# Allegro board ELRS-TX-MODULE-V13-20260610.brd
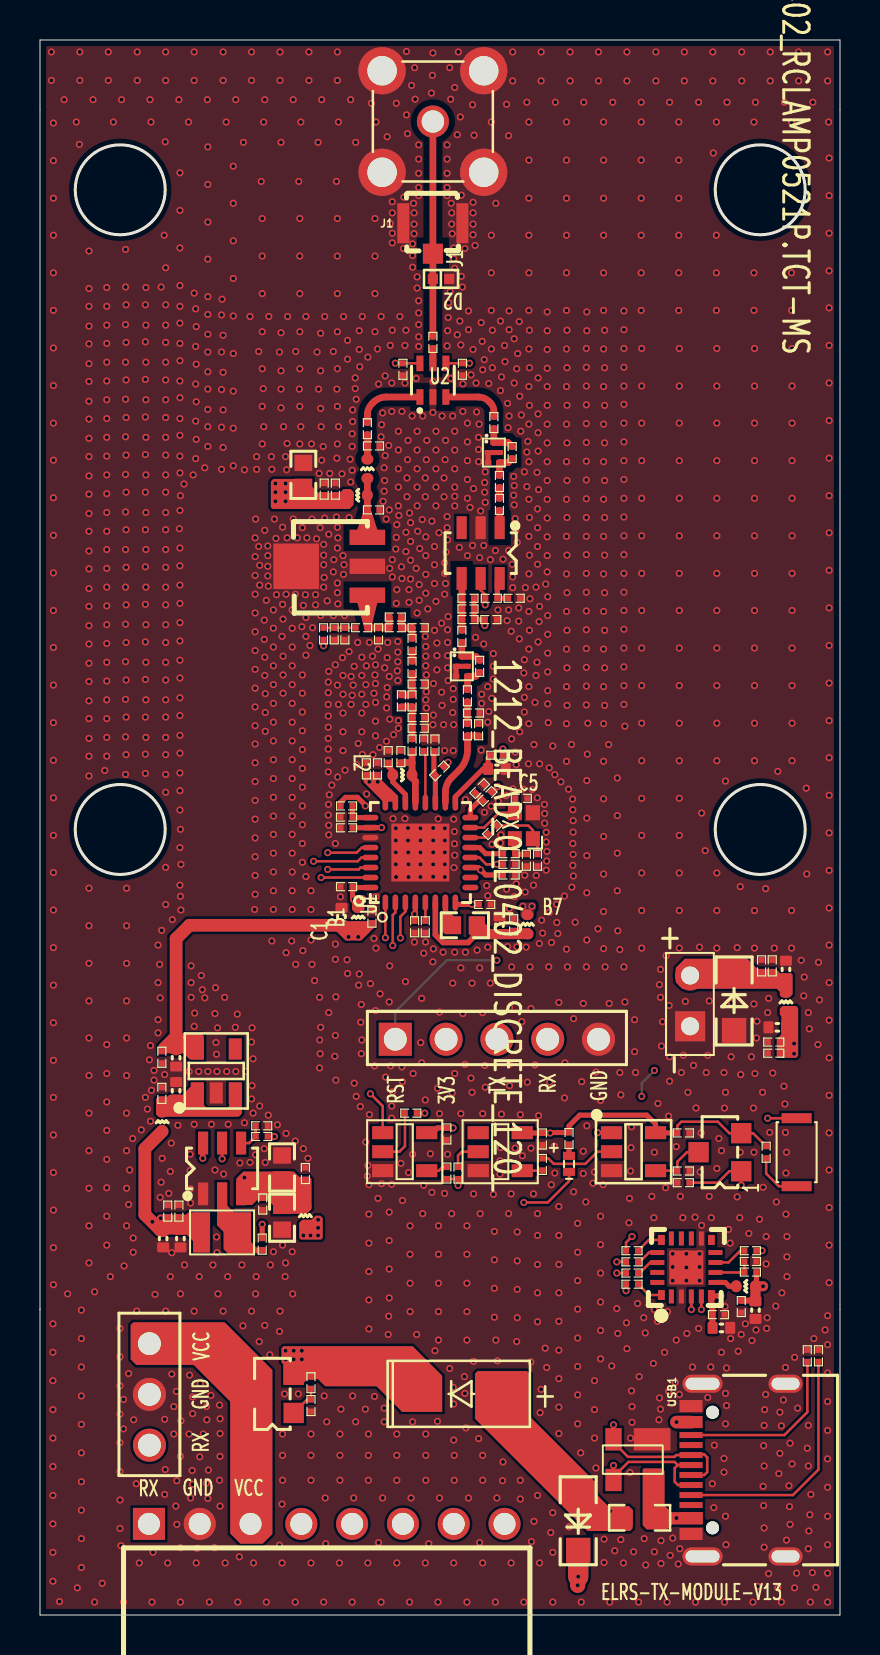
[diagram p0: board, top side]
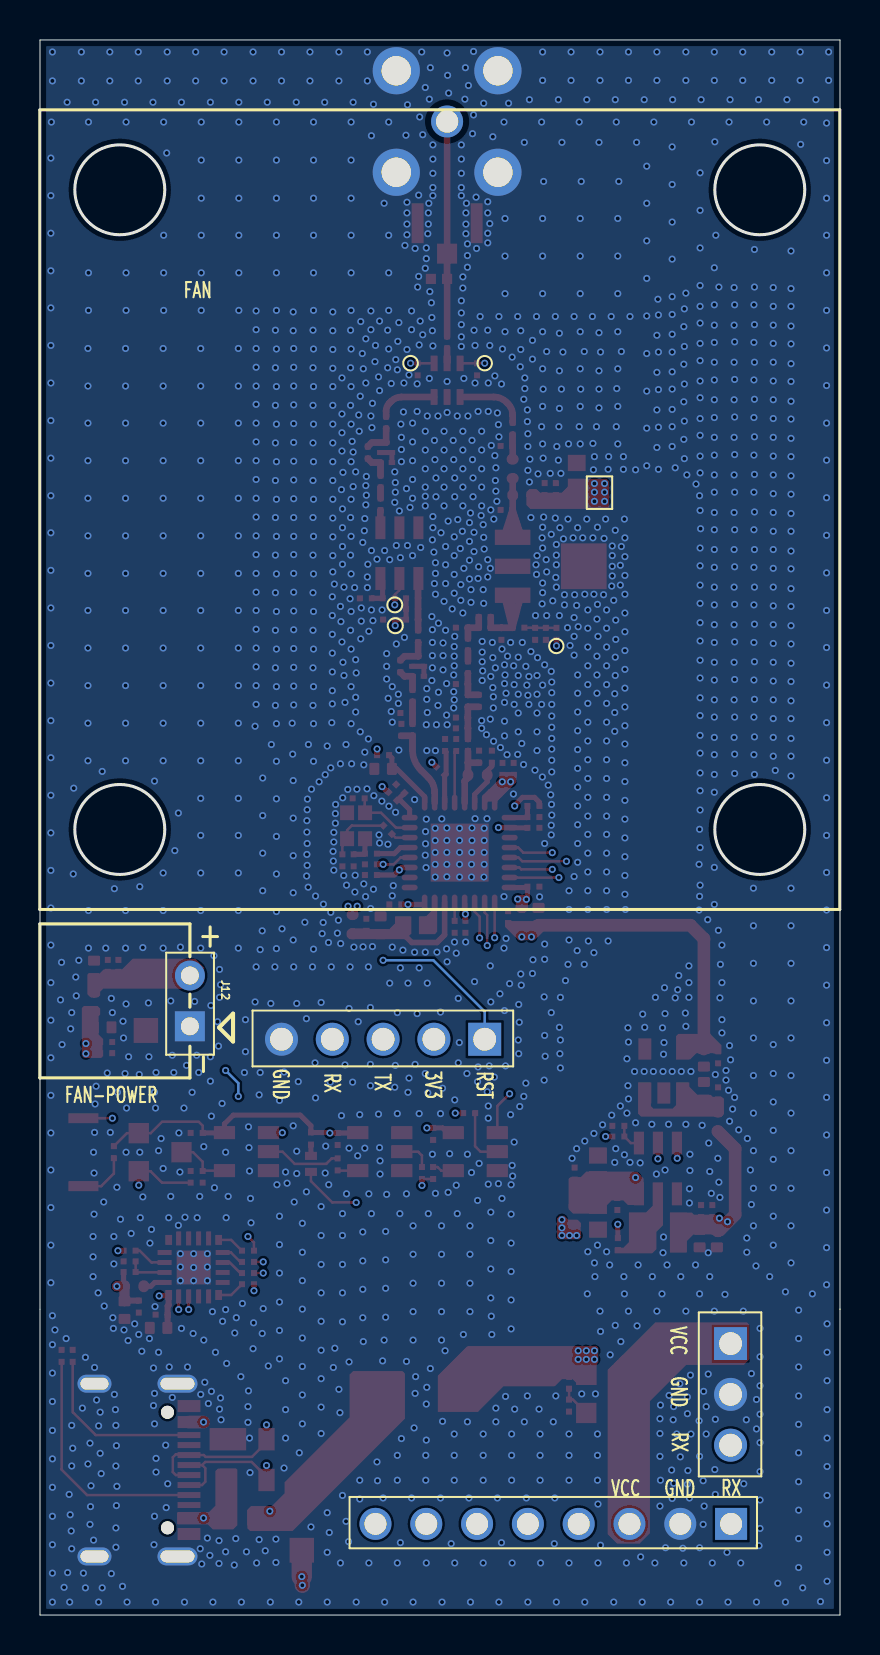
[diagram p1: board, bottom side, seen from below]

Outline 40 x 78.79 mm; copper layers: TOP, L2, L3, BOTTOM. Coordinates in mm from the lower left corner of the outline.
Outline path: circle c4.01,71.3 r2.25 ; circle c4.01,39.3 r2.25 ; circle c36.01,71.3 r2.25 ; circle c36.01,39.3 r2.25 ; 0,15.3 0,0 40,0 40,78.79 0,78.79 0,15.3 0,15.3

## Placement (name value [footprint] x y rotation side)
B1  120_100MHz  [L0402]  15.91 34.91 270 top
B4  1KR_100MHz/200mA  [0201]  22.36 40.96 225 top
B5  1KR_100MHz/200mA  [0201]  15.33 40.48 0 top
B6  1KR_100MHz/200mA  [0201]  19.98 42.23 225 top
B7  120_100MHz  [L0402]  24.37 34.56 270 top
B8  1KR_100MHz/200mA  [0201]  22.57 50.86 180 top
B9  120_100MHz  [L0402]  13.27 19.98 270 top
B10  120_100MHz  [L0402]  37.3 30.67 270 top
B11  120_100MHz  [L0402]  6.11 24.68 270 top
B12  120_100MHz  [L0402]  35.29 16.45 0 top
C1  22uF/6.3V  [C0402]  15.07 34.94 90 top
C2  1uF/10V  [0201]  16.6 34.91 90 top
C3  100nF 16V  [0201]  22.24 35.55 0 top
C5  22uF/6.3V  [C0402]  22.85 42.33 0 top
C6  100nF 16V  [0201]  16.88 42.33 90 top
C7  100nF 16V  [0201]  15.33 36.44 180 top
C10  100nF 16V  [0201]  21.98 41.34 45 top
C11  100nF 16V  [0201]  19.75 43.52 90 top
C12  100nF 16V  [0201]  15.33 39.92 180 top
C14  100nF 16V  [0201]  15.33 39.38 180 top
C18  NC  [0201]  24.88 37.76 270 top
C19  8pF  [0201]  24.06 40.86 0 top
C23  47pF  [0201]  19.65 63.67 90 top
C24  NC  [0201]  18.04 42.94 90 top
C25  NC  [0201]  18.91 44.36 0 top
C26  47pF  [0201]  18.15 62.32 270 top
C28  47pF  [0201]  21.12 62.32 270 top
C33  NC  [0201]  21.93 44.29 90 top
C34  NC  [0201]  21.68 45.12 0 top
C35  100nF 16V  [0201]  18.73 34.43 270 top
C36  100nF 16V  [0201]  17.41 42.94 90 top
C37  27pF  [0201]  17.77 49.39 0 top
C39  47pF  [0201]  15.24 49.09 270 top
C40  6.8pF  [0201]  18.91 44.9 0 top
C41  4.3pF  [0201]  18.91 46.57 0 top
C42  1.5pF  [0201]  18.07 45.73 90 top
C43  47pF  [0201]  16.37 59.35 90 top
C44  47pF  [0201]  22.97 56.71 90 top
C46  8pF  [0201]  16.67 58.48 180 top
C63  22uF/6.3V  [C0402]  6.16 18.83 270 top
C64  10uF 16V  [C0603]  12.1 19.88 270 top
C65  100nF 16V  [0201]  11.14 20.56 90 top
C66  100nF 16V  [0201]  11.11 18.56 270 top
C67  100nF 16V  [0201]  6.39 20.21 270 top
C76  100nF  [0201]  23.71 50.86 180 top
C78  2.2pF  [0201]  21.4 49.8 0 top
C79  1.5pF  [0201]  21.09 48.96 90 top
C80  100nF 16V  [0201]  22.54 49.8 0 top
C109  47pF  [0201]  14.77 56.33 90 top
C110  10nF  [0201]  14.21 56.33 90 top
C111  10uF 16V  [C0603]  13.17 57.04 90 top
C150  22uF/6.3V  [C0402]  7.02 18.83 90 top
C183  100nF 16V  [0201]  23.68 34.53 270 top
C185  10uF 6.3V  [C0402]  22.97 34.51 90 top
C189  100nF 16V  [0201]  25.12 23.81 90 top
C190  100nF 16V  [0201]  20.34 24.07 90 top
C191  100nF 16V  [0201]  24.32 37.76 90 top
C192  47pF  [0201]  18.6 48.55 90 top
C193  15pF  [0201]  16.67 55.28 180 top
C196  11pF  [0201]  16.93 49.09 90 top
C197  2pF  [0201]  18.91 49.39 0 top
C198  10uF 16V  [C0603]  12.1 22.39 90 top
C203  1uF/10V  [0201]  16.32 42.33 90 top
C204  1uF/10V  [0201]  23.46 37.02 0 top
C205  100nF 16V  [0201]  6.09 27.9 270 top
C206  10uF 6.3V  [C0402]  6.81 27.88 270 top
C207  100nF 16V  [0201]  6.09 26.1 90 top
C208  10uF 6.3V  [C0402]  6.81 26.23 90 top
C209  10uF 6.3V  [C0402]  36.87 29.4 180 top
C210  10nF  [0201]  36.69 28.66 180 top
C211  47pF  [0201]  36.69 28.11 180 top
C212  10uF 6.3V  [C0402]  37.3 32.3 90 top
C213  10nF  [0201]  36.61 32.47 90 top
C214  47pF  [0201]  36.08 32.47 90 top
C215  47pF  [0201]  13.27 22.09 90 top
C216  47pF  [0201]  6.95 20.21 90 top
C217  47pF  [0201]  22.69 59.65 90 top
C218  47pF  [0201]  21.37 45.99 90 top
C219  10uF 6.3V  [C0402]  35.77 15.25 270 top
C220  100nF 16V  [0201]  35.06 15.43 270 top
C221  10uF 6.3V  [C0402]  34.07 14.36 180 top
C222  100nF 16V  [0201]  33.92 15.02 180 top
C223  100nF 16V  [0201]  32.17 24.12 180 top
D1  B5819W  [SOD-123FL]  34.71 30.72 270 top
D2  RCLAMP0521P.TCT-MS  [TVS-0402]  20.05 66.84 0 top
D6  LED_RED  [LED0402]  26.45 22.57 90 top
D7  SS34  [SMA]  21.07 11.06 180 top
D8  B5819W  [SOD-123FL]  26.91 4.72 90 top
J1  -  [IPEX-1]  19.64 68.86 90 top
J5  CON3_W  [HD-2R54-1X3]  5.47 13.58 270 top
J6  CON5_NC  [HD-2R54-1X5-RN]  17.77 28.8 0 top
J10  SMA  [SMA-KE]  19.65 74.72 0 top
J12  CON2  [XHB-2R54X2]  32.51 30.72 90 bottom
J13  CON8  [HDR-TH_8P-2M54]  14.34 4.56 0 top
L2  220nH LQW15CNR22J10D  [L0402]  18.12 42.02 180 top
L3  4.7nH  [0201]  18.6 43.52 90 top
L6  12nH  [0201]  21.37 44.29 90 top
L8  7.5nH  [0201]  18.6 45.73 90 top
L9  8.2nH  [0201]  18.6 47.41 90 top
L10  1.5nH  [L0402]  16.37 57.34 270 top
L11  2.2uH 3A  [L2520]  9.1 19.14 270 top
L17  7.5nH  [0201]  22.97 55.56 90 top
L18  6.2nH  [0201]  21.4 50.33 0 top
L22  2.2UH 0.75A  [C0603]  21.25 34.51 0 top
L24  5.6nH  [L0402]  15.89 56.02 0 top
L32  120R/100M  [L0603]  29.98 4.86 180 top
NOREF  -  []  6.77 7.2 90 top
NOREF#2  -  []  21.08 51.85 0 top
NOREF#3  -  []  17.77 28.8 0 top
NOREF#4  -  []  5.47 11.04 90 top
NOREF#5  -  []  9.1 23.61 0 top
NOREF#6  -  []  25.39 28.8 0 top
NOREF#7  -  []  4.17 14.88 0 top
Q1  AO3401A  [SOT23]  11.62 11.06 90 top
Q5  AO3401A  [SOT23]  34 23.15 90 top
Q8  HTU7G06S002P  [SOT-89]  16.37 51.02 90 top
R2  5.1K  [0201]  38.36 12.97 90 top
R4  100K  [0201]  19.26 34.43 270 top
R11  100K/1%  [0201]  23.45 37.55 0 top
R13  49.9K  [0201]  14.18 49.09 90 top
R14  1K  [0201]  26.45 23.84 90 top
R15  49.9K  [0201]  14.71 49.09 270 top
R20  1KR_100MHz  [0201]  22.85 43.02 180 top
R21  49.9k/1%  [0201]  19.19 43.52 90 top
R23  100K  [0201]  32.17 21.63 180 top
R27  56K  [0201]  11.09 23.94 0 top
R28  10K  [0201]  11.09 24.47 180 top
R37  750R  [0201]  21.4 50.86 180 top
R71  22R  [0201]  18.54 25.11 0 top
R73  22R  [0201]  20.34 22.11 90 top
R74  22R  [0201]  25.12 22.54 90 top
R76  22R  [0201]  20.9 22.11 90 top
R81  NC  [0201]  22.62 39.28 45 top
R83  0R  [0201]  23.46 38.09 0 top
R84  1K  [0201]  36.31 23.15 90 top
R85  51R  [0201]  16.08 49.39 0 top
R86  10R  [0201]  17.77 49.92 180 top
R87  100K  [0201]  13.55 10.48 270 top
R88  100K  [0201]  13.55 11.62 270 top
R89  0R  [0201]  21.98 47.46 90 top
R90  0R  [0201]  23.61 58.15 90 top
R149  5.1K  [0201]  38.92 12.97 90 top
R150  1K  [0201]  35.52 18.23 180 top
R151  22.1K  [0201]  35.52 17.16 180 top
R152  47.5K  [0201]  35.52 17.69 180 top
R153  0R  [0201]  29.6 18.23 180 top
R154  0R_NC  [0201]  29.6 16.55 180 top
R155  22R  [0201]  29.6 17.11 0 top
R156  22R  [0201]  29.6 17.67 0 top
R157  100K  [0201]  32.17 22.21 0 top
SW7  SW-3x6x2_5  [SW-3X2X0_6]  37.83 23.15 270 top
U1  TK8620  [QFN32_8620]  19.02 38.14 90 top
U2  SW1179E  [SC70-6]  19.65 61.77 0 top
U4  SP0503BAHT  [SOT143]  29.64 7.77 90 top
U7  TPS563201DDCR  [SOT23-6]  9.1 22.34 90 top
U9  MS2630  [SOT23-6]  22.03 53.12 270 top
U10  ME6211C33M5G-N  [SOT23-5]  8.81 27.22 0 top
U13  CJ74LVC1G240R5N  [SOT23-5]  18.24 23.18 270 top
U14  SN74LVC1G04DCKR  [SOT23-5]  23.01 23.18 270 top
U15  SN74LVC1G66DBVR  [SOT23-5]  29.68 23.18 270 top
U16  SF11S5-915.000-F26IL02AL  [SMD1411-5P]  22.69 58.16 270 top
U17  SF11S5-915.000-F26IL02AL  [SMD1411-5P]  21.09 47.46 270 top
U18  CP2102N-A02-GQFN20R  [QFN-20-3X3]  32.32 17.39 0 top
USB1  TypeC_16P  [TYPEC_16P-SMD]  35.85 7.25 90 top
X1  X1E0002510059  [SMD2016-4P]  24.2 39.48 90 top

## Library data of the parts
B1 B4-B7 B9-B12 = 1212_BEAD_0
B8 L2 L3 L6 L8-L11 L17 L18 L22 L24 = INDUCTOR
C1 C2 C203 = CERAMIC CAPACITOR
C3 C5-C7 C10-C12 C14 C26 C28 C35 C36 C204 C210 C211 C213-C216 = Ceramic Capacitor_14
C18 C19 C23-C25 C33 C34 C40-C44 C76 C78-C80 C191 C192 C217 C218 = Ceramic Capacitor
C37 C39 C197 = C
C46 C63-C67 C150 C183 C185 C189 C190 C193 C196 C198 C223 = CAP_NP
C109-C111 C205-C209 C212 C219-C222 = CAPACITOR NON-POL
D1 D8 = DIODE PIN
D2 = TVS
D6 = MFOE1101_0
D7 = DIODE_1
J1 = IPEX-1
J5 = CON3
J6 = CON5
J10 = SMA_0
J12 = CON2
J13 = CON8
L32 = Ferrite bead
Q1 Q5 = PMOS_GSD
Q8 = MOSFET_EP_GDSD_0
R2 R23 R149-R152 = R
R4 R11 R20 R21 R37 R81 R83 R87-R90 R153 R154 R157 = Resister
R13 R15 R27 R28 R71 R73 R74 R76 R85 R86 R155 R156 = RES
R14 R84 = R_0
SW7 = SW PUSHBUTTON-SPST
U1 = K2201A_3
U2 = AS179-92
U4 = TPD4E002_4
U7 = BUCK_TPS563201
U9 = MS2630
U10 = BL8568CB5ATR33
U13 = BUCK_REF_SY8089_0
U14 = BUCK_REF_SY8089_1
U15 = SN74LVC1G66DBVR
U16 U17 = SF11S5-915.000-F26IL02AL
U18 = CP2102N-A02-GQFN20R
USB1 = TypeC_16P
X1 = Crystal_32M

## Footprints (pads in the part's own frame, mm; a bottom-side part is the same pattern mirrored in y, then rotated)
0201
  rect 0.3x0.3 smd: 1(-0.3,0) 2(0.3,0)
C0402
  custom 0.5x0.6 smd: 1(-0.44,0) 2(0.44,0)
C0603
  rect 0.813x0.889 smd: 1(-0.597,0) 2(0.597,0)
HD-2R54-1X3
  rect 1.651x1.651 hole 1.143: 1(0,0)
  round 1.651 hole 1.143: 2(2.54,0) 3(5.08,0)
HD-2R54-1X5-RN
  rect 1.651x1.651 hole 1.143: 1(0,0)
  round 1.651 hole 1.143: 2(2.54,0) 3(5.08,0) 4(7.62,0) 5(10.16,0)
HDR-TH_8P-2M54
  rect 1.6x1.6 hole 1.1: 1(-8.89,0)
  round 1.6 hole 1.1: 2(-6.35,0) 3(-3.81,0) 4(-1.27,0) 5(1.27,0) 6(3.81,0) 7(6.35,0) 8(8.89,0)
IPEX-1
  rect 1x1 smd: 1(-0.762,0)
  rect 2x0.6 smd: 2(0.762,-1.476) 3(0.762,1.476)
L0402
  oval 0.54x0.6 smd: 1(0.48,0) 2(-0.48,0)
L0603
  rect 0.914x0.787 smd: 1(-0.8,0) 2(0.8,0)
L2520
  rect 2x0.85 smd: 1(0,1.025) 2(0,-1.025)
LED0402
  rect 0.4x0.6 smd: 1(0.4,0) 2(-0.4,0)
QFN32_8620
  oval 0.8x0.28 smd: 1(-2.5,1.75) 2(-2.5,1.25) 3(-2.5,0.75) 4(-2.5,0.25) 5(-2.5,-0.25) 6(-2.5,-0.75) 7(-2.5,-1.25) 8(-2.5,-1.75) 17(2.5,-1.75) 18(2.5,-1.25) 19(2.5,-0.75) 20(2.5,-0.25) 21(2.5,0.25) 22(2.5,0.75) 23(2.5,1.25) 24(2.5,1.75)
  oval 0.28x0.8 smd: 9(-1.75,-2.5) 10(-1.25,-2.5) 11(-0.75,-2.5) 12(-0.25,-2.5) 13(0.25,-2.5) 14(0.75,-2.5) 15(1.25,-2.5) 16(1.75,-2.5) 25(1.75,2.5) 26(1.25,2.5) 27(0.75,2.5) 28(0.25,2.5) 29(-0.25,2.5) 30(-0.75,2.5) 31(-1.25,2.5) 32(-1.75,2.5)
  rect 2.9x2.9 smd: 33(0,0)
QFN-20-3X3
  rect 0.34x0.5 smd: 1(-1.251,-1.377) 6(1.248,-1.377) 11(1.248,1.377) 16(-1.251,1.377)
  rect 0.249x0.701 smd: 2(-0.751,-1.45) 3(-0.25,-1.45) 4(0.248,-1.45) 5(0.748,-1.45) 12(0.748,1.45) 13(0.248,1.45) 14(-0.25,1.45) 15(-0.751,1.45)
  rect 0.701x0.249 smd: 7(1.452,-0.749) 8(1.452,-0.249) 9(1.452,0.249) 10(1.452,0.749) 17(-1.452,0.749) 18(-1.452,0.249) 19(-1.452,-0.249) 20(-1.452,-0.749)
  rect 1.699x1.699 smd: 21(-0.001,0)
SC70-6
  rect 0.35x0.78 smd: 1(-0.65,-0.84) 2(0,-0.84) 3(0.65,-0.84) 4(0.65,0.84) 5(0,0.84) 6(-0.65,0.84)
SMA
  rect 2.032x1.778 smd: 1(1.974,0) 2(-1.974,0)
SMA-KE
  round 1.6 hole 1.118: 1(0,0)
  round 2.362 hole 1.473: 2(-2.54,2.54) 3(-2.54,-2.54) 4(2.54,-2.54) 5(2.54,2.54)
SMD1411-5P
  rect 0.249x0.325 smd: 1(-0.5,-0.001) 2(0,-0.288) 3(0.5,-0.288) 4(0.5,0.288) 5(0,0.288)
SMD2016-4P
  rect 0.749x0.701 smd: 1(-0.65,-0.45) 2(0.65,-0.45) 3(0.65,0.45) 4(-0.65,0.45)
SOD-123FL
  rect 1.25x1.22 smd: 1(-1.475,0) 2(1.475,0)
SOT23
  rect 1.016x1.016 smd: 1(-0.953,-1.067) 2(0.953,-1.067) 3(0,1.067)
SOT23-5
  rect 0.65x1.06 smd: 1(-0.95,-1.1) 2(0,-1.1) 3(0.95,-1.1) 4(0.95,1.1) 5(-0.95,1.1)
SOT23-6
  rect 1.143x0.508 smd: 1(-1.27,0.95) 2(-1.27,0) 3(-1.27,-0.95) 4(1.27,-0.95) 5(1.27,0) 6(1.27,0.95)
SOT143
  rect 1.118x1.829 smd: 1(1.016,-0.965)
  rect 1.118x0.813 smd: 2(1.016,0.965) 3(-1.016,0.965) 4(-1.016,-0.965)
SOT-89
  rect 0.762x1.778 smd: 1(0,0) 2(1.448,0) 3(2.896,0)
  rect 2.286x2.286 smd: 4(1.448,3.556)
SW-3X2X0_6
  rect 0.5x1.5 smd: 1(-1.7,0) 2(1.7,0)
TVS-0402
  rect 0.508x0.508 smd: 1(-0.406,0) 2(0.406,0)
TYPEC_16P-SMD
  round 0.65 hole 0.65 unplated: (-2.89,2.225) (2.89,2.225)
  rect 0.6x1.15 smd: A1B12(-3.2,3.3) A4B9(-2.4,3.3) B1A12(3.2,3.3) B4A9(2.4,3.3)
  rect 0.3x1.15 smd: A5(-1.25,3.3) A6(-0.25,3.3) A7(0.25,3.3) A8(1.25,3.3) B5(1.75,3.3) B6(0.75,3.3) B7(-0.75,3.3) B8(-1.75,3.3)
  oval 0.9x1.7 hole 0.6x1.4: TH1(-4.32,-1.425) TH2(4.32,-1.425)
  oval 0.9x2 hole 0.6x1.7: TH3(-4.32,2.725) TH4(4.32,2.725)
XHB-2R54X2
  rect 1.5x1.5 hole 0.9: 1(-1.27,0)
  round 1.5 hole 0.9: 2(1.27,0)

## Nets
5V: B10.1 B11.1 C63.1 C67.2 C150.2 C209.1 C210.1 C211.1 C216.1 D8.1(K) L11.2 R27.2
AVDD_PALDO_IN: B1.2 C3.1 C6.1 C7.1 C35.1 C78.2 C80.1 C203.1 L18.2 R20.1 R37.1 U1.4(DIO_7) U1.8(VBAT_DCDC) U1.23(TX_VBAT_IN) U1.24(AVDD_PALDO_TX_IN) U1.32(VDD33_IO)
AVDD_SX_1V5: B4.2 C10.1 U1.16(PIN_AVDD15_SX)
AVDD_TX_1V5: B5.2 C12.1 U1.25(AVDD15_TX_IN)
GND: C1.2 C2.2 C3.2 C5.2 C6.2 C7.2 C10.2 C11.2 C12.2 C14.2 C18.2 C19.2 C24.2 C25.2 C26.2 C28.2 C33.2 C34.2 C35.2 C36.2 C39.2 C40.2 C41.2 C46.1 C63.2 C64.2 C65.1 C67.1 C76.1 C80.2 C109.2 C110.2 C111.2 C150.1 C183.1 C185.2 C189.1 C190.1 C191.1 C193.1 C196.1 C197.2 C198.2 C203.2 C204.2 C205.2 C206.2 C207.2 C208.2 C209.2 C210.2 C211.2 C212.2 C213.2 C214.2 C215.2 C216.2 C219.2 C220.2 C221.1 C222.1 C223.1 D1.2(A) D2.2(CATHODE) J1.2(GND_0) J1.3(GND_1) J5.2 J6.5 J10.2 J10.3 J10.4 J10.5 J12.1 J13.2 Q8.2(S1) Q8.4(S2) R2.2 R4.2 R11.2 R15.2 R21.2 R23.2 R28.1 R87.2 R149.2 R152.1 R157.2 U1.27(CHIP_MODE) U1.33(GND) U2.2(GND) U4.1(CM) U7.1(GND) U9.2(GND) U10.2(GND) U13.3(GND) U14.3(GND) U15.3(GND) U16.2(GND1) U16.3(GND2) U16.5(GND3) U17.2(GND1) U17.3(GND2) U17.5(GND3) U18.3(GND1) U18.12(GND2) U18.21(EP) USB1.A1B12(GND#A1B12) USB1.B1A12(GND#B1A12) USB1.TH1 USB1.TH2 USB1.TH3 USB1.TH4 X1.2(GND#2)
VBAT_BG_3V3: C5.1 R20.2 U1.17(VBAT_BG)
VBUS: B12.1 C219.1 C220.1 D7.2(A) D8.2(A) L32.2 Q5.1(G) R23.1 R151.1
VCC: B9.1 C109.1 C110.1 C111.1 D7.1(K) L24.2 Q1.2(S) R88.1
VCC_3V3: B1.1 C1.1 C2.1 C189.2 C190.2 C205.1 C206.1 C223.2 J6.2 Q5.2(S) R14.2 R84.2 U10.5(VOUT) U13.5(VCC) U14.5(VCC) U15.5(VCC)
VDD: C221.2 C222.2 R150.1 U18.6(VDD)
VDD18_XOSC: R83.1 U1.13(AVDD18_XOSC32M)
VDD_DCIN_1V5: B6.2 C11.1 U1.19(DCDC_IN)
VDD_IO_1V8: C14.1 C204.1 U1.11(VDDIO_18_PMU_OUT) U1.26(VDD18_IO)
BUCK_SW: L22.1 U1.7(BUCK_SW)
DC_TP: R21.1 U1.20(PIN_TOP_DC_TP)
EFUSE: R4.1 U1.5(FSOURCE_EFUSE)
ELRS_RXD: J5.3 J13.1 R73.1 R76.1
GPIO_0: D6.2(CATHODE) U1.28(DIO_0)
GPIO_1: C28.1 R13.1 U1.29(DIO_1) U2.4(V1)
GPIO_2: B8.2 C26.1 U1.30(DIO_2) U2.6(V2) U9.5(S\H\D\N\)
GPIO_3: U1.31(DIO_3) U13.1(\\O\E)
GPIO_4: J6.3 R71.2 R156.1 U1.1(DIO_4)
GPIO_5: J6.4 R155.1 U1.2(DIO_5) U15.1(A)
GPIO_6: SW7.1 U1.3(DIO_6)
OSC32M_N: R81.1 U1.14(XTA)
OSC32M_P: C19.1 U1.15(XTB) X1.3(OSC2)
PA_IN: C192.1 L9.2
PALDO1V3_OUT: C36.1 L2.1 U1.22(TX_PMU_PALDO_OUT)
RF_ANT: C23.2 D2.1(ANODE) J1.1(SIGNAL) J10.1
RF_IN: C33.1 L6.1 U1.18(RF_IN)
RF_OUT: C24.1 L2.2 L3.1 U1.21(RF_OUT)
RST: J6.1 R11.1 R153.2 R154.2 U1.12(RESET)
UD+: U4.2(V1) U18.4(D+) USB1.A6(DP1) USB1.B6(DP2)
UD-: U4.3(V2) U18.5(D-) USB1.A7(DN1) USB1.B7(DN2)
VREG_1V5_OUT: B7.1 C183.2 C185.1 L22.2 U1.6(VREG)
VUSB: L32.1 U4.4(V3) USB1.A4B9(VBUS#A4B9) USB1.B4A9(VBUS#B4A9)
N16776015: C25.1 C40.1 C42.1 L3.2 L8.1
N16777879: C217.2 U2.3(J2)
N16778700: C44.2 R90.1 U16.4(OUT)
N16778719: C43.2 U2.1(J3)
N16856392: C34.1 C218.1 L6.2
N16872777: C41.1 C42.2 L8.2 L9.1
N16874165: C23.1 U2.5(J1)
N16875495: C191.2 R83.2 X1.4(GND#4)
N16880632: C18.1 R81.2 X1.1(OSC1)
N16909839: B4.1 B5.1 B6.1 B7.2
N16929000: R76.2 U14.2(A)
N16929184: R74.1 U14.4(Y)
N16930852: D6.1(ANODE) R14.1
N16930918: R84.1 SW7.2
N16939696: L17.1 U9.1(RF_IN)
N16939714: B8.1 C76.2 U9.6(VCC)
N16939739: C78.1 C79.2 L18.1 R37.2 U9.4(RFOUT)
N16940146: C44.1 L17.2
N16941501: C37.2 C192.2 C197.1 R86.1
N16941503: C39.1 R13.2 R15.1 R85.1
N16941580: C37.1 C196.2 Q8.1(G) R85.2 R86.2
N16941590: C193.2 L10.1 L24.1 Q8.3(D)
N16941660: C43.1 C46.2 L10.2
N16945663: C79.1 R89.2 U17.1(IN)
N16952078: R71.1 U13.2(A)
N16952087: R73.2 U13.4(Y)
N16959017: B9.2 C64.1 C65.2 C198.1 C215.1 U7.3(IN) U7.5(EN)
N16963900: R74.2 U15.2(B)
N16966098: J5.1 J13.3 Q1.3(D)
N16971247: B10.2 C212.1 C213.1 C214.1 D1.1(K) J12.2
N16972768: Q1.1(G) R87.1 R88.2
N16973924: C66.2 L11.1 U7.2(SW)
N16973930: C66.1 U7.6(BST)
N16973932: R27.1 R28.2 U7.4(FB)
N16976867: B11.2 C207.1 C208.1 U10.1(VIN) U10.3(CE)
N16979632: C217.1 R90.2 U16.1(IN)
N16979839: C218.2 R89.1 U17.4(OUT)
N16982314: R149.1 USB1.A5(CC1)
N16982316: R2.1 USB1.B5(CC2)
N16982600: B12.2 U18.7(VREGIN)
N16985180: R150.2 U18.9(RSTB)
N16987430: R151.2 R152.2 U18.8(VBUS)
N16992423: R153.1 U18.16(RTS)
N16992488: R154.1 U18.1(GPIO.1/RS485)
N16992572: R156.2 U18.17(RXD)
N16992577: R155.2 U18.18(TXD)
N16996606: Q5.3(D) R157.1 U15.4(C)

Pads without a net: J13 4 5 6 7 8; U1 9 10; U9 3; U10 4; U14 1; U18 2 10 11 13 14 15 19 20; USB1 A8 B8

## Via types
v1: diameter 0.356, hole 0.203, TOP to BOTTOM, 2259 vias

## Routing (per net, layer and track width the routed paths; a pad name or vN(x,y) marks a point on that pad's centre or on a via; arc(x,y) is an arc through that point)
5V: length 96.8
  TOP w0.127: R27.2 v1(11.72,23.94)
  TOP w0.254: v1(37.7,28.08) v1(37.7,28.59) 37.06,28.59 C210.1
  TOP w0.508: 26.88,1.89 v1(26.91,1.92)
  TOP w0.635: B11.1 5.24,23.33 5.24,20.03 6.01,19.27 6.06,19.27 6.09,19.24 6.1,19.25 6.11,19.24 6.11,19.22 C63.1
  TOP w0.762: v1(26.88,1.49) 26.88,1.89
  TOP w1.016: D8.1 v1(26.91,1.92)
  L3 w0.127: v1(11.72,23.94) 7.58,23.94 6.97,23.33 6.97,20.79 v1(6.03,19.85)
  L3 w1.016: v1(26.91,1.92) 26.91,1.62 26.91,1.61 ; v1(6.03,19.85) 5.8,19.85 v1(5.62,19.67) 5.62,17.46 3.01,14.85 3.01,3.16 4.56,1.61 26.91,1.61 ; v1(37.7,28.08) 38.27,27.51 38.27,14.96 35.27,11.95 35.27,2.38 34.5,1.61 26.91,1.61
AVDD_PALDO_IN: length 36.9
  TOP w0.254: 17.22,41.2 17.27,41.15 U1.24 ; 17.22,41.2 17.49,41.2 17.77,40.92 U1.23 ; 17.22,41.2 16.89,41.53 v1(16.89,41.68) 16.89,42.02 C6.1 C203.1 ; v1(15.68,35.8) 15.63,35.86 C7.1 15.67,36.39 U1.32 ; R37.1 L18.2 C78.2 C80.1 v1(22.24,49.5) ; C3.1 v1(21.6,35.55) 20.86,35.55 U1.8 ; C35.1 v1(18.73,35.07) 18.77,35.1 U1.4 ; R20.1 v1(23.15,43.33)
  L3 w0.508: 22.59,43.88 18.43,43.88 16.89,42.34 v1(16.89,41.68) v1(16.47,41.68) 15.68,41.68 15.15,41.15 15.15,39.26 15.76,38.65 15.76,36.17 v1(16.11,35.81) 16.86,35.07 v1(18.73,35.07) 21.12,35.07 v1(21.6,35.55) ; 22.59,43.88 23.43,44.72 23.43,48.31 v1(22.24,49.5) ; 22.59,43.88 v1(23.15,43.33)
AVDD_SX_1V5: length 1.8
  TOP w0.254: C10.1 B4.2 21.97,40.75 21.52,40.29 U1.16
AVDD_TX_1V5: length 1.5
  TOP w0.254: B5.2 C12.1 15.65,39.89 U1.25
GND: length 2.2
  TOP w0.254: U17.3 U17.2 U17.5 ; U16.5 U16.2 U16.3
  vias: v1(0.57,78.19) v1(0.57,76.77) v1(0.67,74.64) v1(0.67,72.76) v1(0.67,70.88) v1(0.67,69.03) v1(0.67,67.15) v1(0.67,65.27) v1(0.67,63.39) v1(0.67,61.51) v1(0.67,59.63) v1(0.67,57.77) v1(0.67,55.89) v1(0.67,54.01) v1(0.67,52.13) v1(0.67,50.25) v1(0.67,48.4) v1(0.67,46.52) v1(0.67,44.64) v1(0.67,42.76) v1(0.67,40.88) v1(0.67,39) v1(0.67,37.15) v1(0.67,35.27) v1(0.67,33.39) v1(0.67,31.51) v1(0.67,29.63) v1(0.67,27.75) v1(0.67,25.9) v1(0.67,24.02) v1(0.67,22.14) v1(0.67,20.26) v1(0.67,18.38) v1(0.67,16.52) v1(0.65,14.57) v1(0.65,13.15) v1(0.65,11.72) v1(0.65,10.27) v1(0.65,8.85) v1(0.65,7.43) v1(0.65,5.98) v1(0.65,4.56) v1(0.65,3.14) v1(0.65,1.69) v1(0.98,0.67) v1(1.2,75.81) v1(1.38,16.07) v1(1.81,74.69) v1(1.87,1.36) v1(1.99,78.19) v1(1.99,76.77) v1(1.97,73.57) v1(2.07,15.25) v1(2.07,13.83) v1(2.07,12.41) v1(2.07,10.96) v1(2.07,9.54) v1(2.07,8.12) v1(2.07,6.67) v1(2.07,5.25) v1(2.07,3.82) v1(2.07,2.38) v1(2.45,68.24) v1(2.45,66.36) v1(2.45,65.47) v1(2.45,64.48) v1(2.45,63.59) v1(2.45,62.6) v1(2.45,61.71) v1(2.45,60.72) v1(2.45,59.83) v1(2.45,58.87) v1(2.45,57.95) v1(2.45,56.99) v1(2.45,56.07) v1(2.45,55.11) v1(2.45,54.22) v1(2.45,53.23) v1(2.45,52.34) v1(2.45,51.35) v1(2.45,50.46) v1(2.45,49.49) v1(2.45,48.58) v1(2.45,47.61) v1(2.45,46.7) v1(2.45,45.73) v1(2.45,44.84) v1(2.45,43.85) v1(2.45,42.96) v1(2.45,41.97) v1(2.45,36.36) v1(2.45,34.48) v1(2.45,32.6) v1(2.45,30.72) v1(2.45,28.87) v1(2.45,26.99) v1(2.45,25.11) v1(2.45,23.23) v1(2.45,21.35) v1(2.45,19.47) v1(2.45,17.62) v1(2.65,75.81) v1(2.73,16.17) v1(2.73,0.65) v1(3.11,1.59) v1(3.24,42.25) v1(3.34,66.41) v1(3.34,65.47) v1(3.34,64.53) v1(3.34,63.61) v1(3.34,62.68) v1(3.34,61.74) v1(3.34,60.8) v1(3.34,59.86) v1(3.34,58.92) v1(3.34,57.98) v1(3.34,57.04) v1(3.34,56.1) v1(3.34,55.16) v1(3.34,54.22) v1(3.34,53.3) v1(3.34,52.36) v1(3.34,51.42) v1(3.34,50.48) v1(3.34,49.54) v1(3.34,48.6) v1(3.34,47.66) v1(3.34,46.72) v1(3.34,45.78) v1(3.34,44.84) v1(3.34,43.9) v1(3.34,42.96) v1(3.34,28.54) v1(3.34,27.09) v1(3.34,25.67) v1(3.34,24.24) v1(3.34,22.8) v1(3.34,21.37) v1(3.34,19.95) v1(3.34,18.5) v1(3.41,78.19) v1(3.41,76.77) v1(3.52,16.93) v1(3.67,74.69) v1(4,14.34) v1(4,12.92) v1(4,11.47) v1(4,10.05) v1(4,8.62) v1(4,7.18) v1(4,5.75) v1(4,4.33) v1(4.07,75.81) v1(4.05,3.47) v1(4.2,17.46) v1(4.18,10.78) v1(4.18,9.31) v1(4.18,0.65) v1(4.28,68.31) v1(4.28,66.43) v1(4.3,65.55) v1(4.28,64.55) v1(4.3,63.67) v1(4.28,62.68) v1(4.3,61.79) v1(4.28,60.82) v1(4.3,59.91) v1(4.28,58.94) v1(4.3,58.03) v1(4.28,57.06) v1(4.3,56.17) v1(4.28,55.18) v1(4.3,54.29) v1(4.28,53.3) v1(4.3,52.41) v1(4.28,51.42) v1(4.3,50.53) v1(4.28,49.57) v1(4.3,48.65) v1(4.28,47.69) v1(4.3,46.77) v1(4.28,45.81) v1(4.3,44.92) v1(4.28,43.93) v1(4.3,43.04) v1(4.28,42.05) v1(4.33,36.36) v1(4.33,34.48) v1(4.33,32.6) v1(4.33,30.72) v1(4.33,28.87) v1(4.33,26.99) v1(4.33,25.11) v1(4.33,23.23) v1(4.33,21.35) v1(4.33,19.47) v1(4.48,22.26) v1(4.43,20.54) v1(4.43,12.08) v1(4.63,23.84) v1(4.66,18.86) v1(4.66,18.15) v1(4.68,9.77) v1(4.81,6.57) v1(4.86,78.19) v1(4.86,76.77) v1(4.84,15.2) v1(4.96,2.6) v1(5.07,24.27) v1(5.29,66.41) v1(5.27,65.55) v1(5.29,64.53) v1(5.27,63.69) v1(5.29,62.68) v1(5.27,61.81) v1(5.29,60.8) v1(5.27,59.93) v1(5.29,58.92) v1(5.27,58.05) v1(5.29,57.04) v1(5.27,56.17) v1(5.29,55.16) v1(5.27,54.29) v1(5.29,53.3) v1(5.27,52.44) v1(5.29,51.42) v1(5.27,50.56) v1(5.29,49.54) v1(5.27,48.68) v1(5.29,47.66) v1(5.27,46.8) v1(5.29,45.78) v1(5.27,44.92) v1(5.29,43.9) v1(5.27,43.07) v1(5.27,42.1) v1(5.27,25.9) v1(5.37,25.31) v1(5.5,75.81) v1(5.47,27.78) v1(5.55,74.69) v1(5.52,28.49) v1(5.57,26.25) v1(5.52,24.7) v1(5.6,0.65) v1(5.7,27.24) v1(5.7,26.76) v1(5.65,3.14) v1(5.75,16.04) v1(5.9,33.52) v1(5.9,31.64) v1(5.9,29.78) v1(5.9,29.12) v1(5.98,32.55) v1(6.01,30.87) v1(6.01,20.89) v1(6.06,66.43) v1(6.08,34.25) v1(6.11,22.85) v1(6.06,21.65) v1(6.21,69.03) v1(6.28,78.19) v1(6.28,76.77) v1(6.26,73.7) v1(6.28,67.4) v1(6.28,65.55) v1(6.28,64.53) v1(6.28,63.67) v1(6.28,62.68) v1(6.28,61.79) v1(6.28,60.8) v1(6.28,59.91) v1(6.28,58.92) v1(6.28,58.03) v1(6.28,57.04) v1(6.28,56.17) v1(6.28,55.16) v1(6.28,54.29) v1(6.28,53.3) v1(6.28,52.41) v1(6.28,51.42) v1(6.28,50.53) v1(6.28,49.54) v1(6.28,48.65) v1(6.28,47.66) v1(6.28,46.77) v1(6.28,45.78) v1(6.28,44.92) v1(6.28,43.9) v1(6.28,43.04) v1(6.28,42.05) v1(6.28,41.16) v1(6.28,37.4) v1(6.28,35.55) v1(6.23,27.04) v1(6.28,15.2) v1(6.23,9.79) v1(6.26,7.28) v1(6.23,6.03) v1(6.39,2.6) v1(6.51,22.19) v1(6.44,21.1) v1(6.51,16.93) v1(6.56,23.61) v1(6.59,18.12) v1(6.59,12.05) v1(6.61,34.79) v1(6.69,10.43) v1(6.69,9.06) v1(6.79,5.45) v1(6.89,24.5) v1(6.82,11.19) v1(6.84,6.72) v1(6.84,4.53) v1(6.95,75.81) v1(7,72.15) v1(7,70.27) v1(7,68.39) v1(7,66.51) v1(7,65.47) v1(7,64.63) v1(7,63.61) v1(7,62.75) v1(7,61.74) v1(7,60.9) v1(7,59.86) v1(7,59.02) v1(7,57.98) v1(7,57.14) v1(7,55.26) v1(6.97,54.34) v1(7,53.38) v1(7,52.49) v1(7,51.52) v1(7,50.61) v1(7,49.64) v1(7,48.73) v1(7,47.77) v1(7,46.88) v1(7,45.89) v1(7,45) v1(7,44.01) v1(7,43.12) v1(7,42.13) v1(7,41.24) v1(7,40.27) v1(7,38.39) v1(7,36.51) v1(7.02,55.99) v1(7.02,39.31) v1(7.05,37.55) v1(7.02,35.95) v1(7.05,35.27) v1(7.02,16.07) v1(7.05,9.72) v1(7.02,7.94) v1(7.02,3.37) v1(7.02,0.65) v1(7.2,56.58) v1(7.22,17.51) v1(7.43,74.69) v1(7.45,27.19) v1(7.5,23.05) v1(7.5,22.24) v1(7.48,12) v1(7.45,9.06) v1(7.55,32.47) v1(7.55,31.64) v1(7.55,30.9) v1(7.53,21.32) v1(7.53,20.61) v1(7.61,7.23) v1(7.53,5.86) v1(7.71,78.19) v1(7.71,76.77) v1(7.71,66.13) v1(7.66,57.04) v1(7.71,29.45) v1(7.71,24.55) v1(7.71,15.2) v1(7.63,10.91) v1(7.63,10.07) v1(7.63,6.54) v1(7.78,65.34) v1(7.81,64.45) v1(7.78,63.46) v1(7.81,62.57) v1(7.78,61.58) v1(7.81,60.69) v1(7.78,59.73) v1(7.81,58.81) v1(7.78,57.85) v1(7.73,30.11) v1(7.81,2.6) v1(7.86,3.34) v1(7.94,27.19) v1(7.96,16.93) v1(8.01,11.57) v1(7.99,7.91) v1(8.06,31.99) v1(8.11,31.28) v1(8.16,9.06) v1(8.24,57.39) v1(8.24,30.87) v1(8.37,75.81) v1(8.39,73.44) v1(8.39,71.57) v1(8.39,69.69) v1(8.39,67.83) v1(8.39,65.95) v1(8.39,65.06) v1(8.39,64.07) v1(8.39,63.18) v1(8.39,62.19) v1(8.39,61.33) v1(8.39,60.31) v1(8.39,59.45) v1(8.39,58.46) v1(8.39,27.19) v1(8.32,10.43) v1(8.34,9.77) v1(8.32,6.59) v1(8.39,5.83) v1(8.42,7.25) v1(8.47,0.65) v1(8.57,24.55) v1(8.55,10.99) v1(8.65,17.51) v1(8.77,31.38) v1(8.75,30.09) v1(8.8,28.64) v1(8.75,22.26) v1(8.72,3.37) v1(8.88,29.38) v1(8.82,28.05) v1(8.85,27.19) v1(8.82,18.91) v1(8.85,18.12) v1(8.9,16.07) v1(8.98,10.5) v1(9,9.82) v1(9,9.08) v1(9,7.94) v1(8.98,6.74) v1(9,5.45) v1(9.1,65.82) v1(9.08,65.04) v1(9.08,63.18) v1(9.08,61.3) v1(9.08,59.42) v1(9.08,57.32) v1(9.15,78.19) v1(9.15,76.77) v1(9.15,64.02) v1(9.15,62.17) v1(9.15,60.29) v1(9.15,58.41) v1(9.18,22.06) v1(9.15,15.2) v1(9.31,74.69) v1(9.23,30.9) v1(9.26,2.6) v1(9.33,27.19) v1(9.41,24.55) v1(9.38,16.93) v1(9.66,72.48) v1(9.66,70.63) v1(9.66,68.75) v1(9.66,66.87) v1(9.66,64.99) v1(9.66,63.11) v1(9.66,61.23) v1(9.66,59.37) v1(9.66,57.49) v1(9.79,75.81) v1(9.76,29.4) v1(9.79,27.19) v1(9.87,30.06) v1(9.89,0.65) v1(9.99,22.62) v1(9.97,2.91) v1(10.09,17.51) v1(10.17,73.67) v1(10.15,14.47) v1(10.22,57.29) v1(10.27,27.19) v1(10.22,24.63) v1(10.5,64.96) v1(10.5,22.64) v1(10.58,78.19) v1(10.58,76.77) v1(10.6,29.38) v1(10.58,28.66) v1(10.6,26.48) v1(10.58,25.82) v1(10.58,15.2) v1(10.65,27.83) v1(10.65,25.11) v1(10.68,2.6) v1(10.78,54.83) v1(10.76,53.89) v1(10.76,52.95) v1(10.76,52.01) v1(10.76,51.07) v1(10.76,50.13) v1(10.76,49.19) v1(10.76,48.25) v1(10.76,47.31) v1(10.76,46.37) v1(10.76,45.43) v1(10.76,44.49) v1(10.76,43.57) v1(10.76,42.63) v1(10.76,41.69) v1(10.76,40.75) v1(10.76,39.82) v1(10.76,38.88) v1(10.76,37.94) v1(10.76,37) v1(10.76,36.06) v1(10.73,35.29) v1(10.78,23.03) v1(10.81,16.93) v1(10.78,16.07) v1(10.83,57.95) v1(10.83,57.32) v1(10.93,63.21) v1(10.93,53.45) v1(10.98,52.52) v1(10.98,51.52) v1(10.98,25.46) v1(10.96,13.68) v1(11.06,71.72) v1(11.11,69.86) v1(11.11,67.98) v1(11.11,66.1) v1(11.11,64.2) v1(11.11,62.34) v1(11.11,60.47) v1(11.11,58.59) v1(11.19,74.69) v1(11.16,61.35) v1(11.19,59.45) v1(11.21,49.77) v1(11.21,48.81) v1(11.21,23.33) v1(11.24,75.81) v1(11.24,54.27) v1(11.24,47.92) v1(11.24,47) v1(11.26,46.09) v1(11.26,45.15) v1(11.26,44.21) v1(11.26,22.64) v1(11.24,14.49) v1(11.39,53.48) v1(11.39,53) v1(11.39,52.46) v1(11.39,51.98) v1(11.31,50.76) v1(11.31,0.65) v1(11.44,64.96) v1(11.42,51.47) v1(11.42,25.01) v1(11.49,13.02) v1(11.57,57.95) v1(11.59,57.32) v1(11.59,33.72) v1(11.52,17.51) v1(11.67,50.28) v1(11.67,49.37) v1(11.67,48.43) v1(11.67,47.49) v1(11.67,46.55) v1(11.67,45.61) v1(11.67,44.67) v1(11.67,43.73) v1(11.67,42.79) v1(11.67,41.85) v1(11.67,40.91) v1(11.67,39.97) v1(11.67,39.05) v1(11.67,38.11) v1(11.67,37.17) v1(11.67,36.23) v1(11.67,35.29) v1(11.67,18.17) v1(11.72,54.83) v1(11.8,53.86) v1(11.82,51.04) v1(11.87,24.52) v1(12,78.19) v1(12,76.77) v1(11.97,63.18) v1(12,15.2) v1(11.97,14.19) v1(11.97,3.49) v1(12.05,73.67) v1(12.05,64.15) v1(12.05,62.24) v1(12.05,61.33) v1(12.05,60.39) v1(12.1,48.96) v1(12.1,5.55) v1(12.1,2.6) v1(12.18,59.45) v1(12.13,54.42) v1(12.13,50.56) v1(12.15,49.82) v1(12.15,47.97) v1(12.15,47.03) v1(12.15,46.11) v1(12.13,18.5) v1(12.13,9.06) v1(12.13,7.99) v1(12.13,6.74) v1(12.28,57.95) v1(12.3,51.07) v1(12.3,33.13) v1(12.3,24.09) v1(12.28,17.62) v1(12.25,16.93) v1(12.23,11.06) v1(12.38,64.96) v1(12.36,58.61) v1(12.33,57.29) v1(12.36,53.89) v1(12.61,50.28) v1(12.61,49.37) v1(12.61,48.43) v1(12.61,47.49) v1(12.61,46.55) v1(12.61,45.61) v1(12.61,44.67) v1(12.61,43.73) v1(12.61,42.79) v1(12.61,41.85) v1(12.61,40.91) v1(12.61,39.97) v1(12.61,39.05) v1(12.61,38.11) v1(12.61,37.17) v1(12.61,36.23) v1(12.61,35.29) v1(12.58,33.72) v1(12.61,18.17) v1(12.66,75.81) v1(12.66,54.83) v1(12.63,16.07) v1(12.79,63.21) v1(12.76,51.07) v1(12.79,32.55) v1(12.76,23.71) v1(12.76,0.65) v1(12.86,53.89) v1(12.94,71.72) v1(12.99,69.86) v1(12.99,67.98) v1(12.99,66.1) v1(12.99,64.2) v1(12.99,62.34) v1(12.96,61.33) v1(12.99,60.47) v1(12.99,58.59) v1(12.91,11.06) v1(13.04,74.69) v1(13.04,59.45) v1(13.09,49.44) v1(13.12,54.39) v1(13.17,50.51) v1(13.12,47.03) v1(13.12,46.11) v1(13.12,45.17) v1(13.12,44.23) v1(13.12,43.29) v1(13.12,42.36) v1(13.12,41.42) v1(13.12,40.48) v1(13.12,39.54) v1(13.12,38.6) v1(13.12,37.66) v1(13.14,33.24) v1(13.17,23.33) v1(13.3,64.96) v1(13.27,51.04) v1(13.3,49.9) v1(13.3,48.96) v1(13.3,48.02) v1(13.3,36.94) v1(13.35,53.89) v1(13.4,22.85) v1(13.45,78.19) v1(13.45,76.77) v1(13.5,48.5) v1(13.57,58.59) v1(13.6,54.83) v1(13.55,36.23) v1(13.55,35.29) v1(13.55,33.77) v1(13.6,32.55) v1(13.55,9.06) v1(13.55,7.99) v1(13.55,6.74) v1(13.55,2.6) v1(13.63,49.39) v1(13.78,51.04) v1(13.78,50.53) v1(13.73,31.74) v1(13.9,73.67) v1(13.85,63.18) v1(13.83,53.84) v1(13.93,61.33) v1(13.96,57.11) v1(14.01,54.39) v1(13.98,30.9) v1(13.98,28.77) v1(14.01,28.08) v1(13.98,27.37) v1(14.08,75.81) v1(14.03,64.12) v1(14.03,62.24) v1(14.03,60.36) v1(14.06,59.45) v1(14.08,57.77) v1(14.03,50) v1(14.03,29.4) v1(14.16,58.46) v1(14.18,53.56) v1(14.18,53.02) v1(14.18,52.54) v1(14.21,51.91) v1(14.18,51.42) v1(14.21,10.96) v1(14.18,0.65) v1(14.23,64.96) v1(14.23,54.88) v1(14.26,5.86) v1(14.29,3.57) v1(14.36,50.74) v1(14.41,46.67) v1(14.41,46.14) v1(14.41,45.56) v1(14.41,44.97) v1(14.41,44.41) v1(14.41,43.85) v1(14.41,43.32) v1(14.41,42.76) v1(14.41,42.18) v1(14.41,40.02) v1(14.34,9.67) v1(14.49,57.11) v1(14.44,54.06) v1(14.44,47.21) v1(14.46,41.03) v1(14.43,40.55) v1(14.44,39.51) v1(14.44,39.03) v1(14.44,30.14) v1(14.59,41.52) v1(14.67,63.21) v1(14.69,52.79) v1(14.67,52.18) v1(14.67,50) v1(14.77,47.54) v1(14.77,38.6) v1(14.77,33.57) v1(14.77,32.8) v1(14.79,30.93) v1(14.77,28.99) v1(14.74,27.95) v1(14.79,26.76) v1(14.87,78.19) v1(14.87,76.77) v1(14.82,71.72) v1(14.87,69.86) v1(14.87,67.98) v1(14.87,66.1) v1(14.87,64.2) v1(14.87,62.34) v1(14.84,61.33) v1(14.87,60.47) v1(14.87,58.59) v1(14.84,57.87) v1(14.82,54.93) v1(14.87,54.42) v1(14.9,53.89) v1(14.87,53.38) v1(14.87,51.63) v1(14.87,51.14) v1(14.9,50.58) v1(14.87,46.52) v1(14.88,41.92) v1(14.92,74.69) v1(14.92,59.45) v1(14.92,45.56) v1(15,9.06) v1(15,7.99) v1(15,6.74) v1(14.97,2.6) v1(15.1,57.09) v1(15.02,35.93) v1(15.05,10.3) v1(15.17,64.96) v1(15.15,53) v1(15.2,52.54) v1(15.17,52.06) v1(15.12,47.89) v1(15.15,47) v1(15.15,46.06) v1(15.15,45.12) v1(15.15,44.18) v1(15.15,43.24) v1(15.23,50) v1(15.25,42.27) v1(15.38,63.77) v1(15.38,62.83) v1(15.35,32.78) v1(15.38,32.09) v1(15.5,57.82) v1(15.45,54.9) v1(15.45,48.2) v1(15.53,75.81) v1(15.61,59.09) v1(15.61,58.46) v1(15.61,57.26) v1(15.53,56.68) v1(15.56,46.95) v1(15.61,46.01) v1(15.56,45.56) v1(15.61,0.65) v1(15.63,60.29) v1(15.63,59.7) v1(15.71,47.46) v1(15.66,46.52) v1(15.71,26.61) v1(15.63,10.96) v1(15.68,5.86) v1(15.78,73.67) v1(15.76,61.89) v1(15.76,61.35) v1(15.81,60.82) v1(15.81,25.95) v1(15.78,9.67) v1(15.89,48.65) v1(15.91,43.6) v1(15.82,42.55) v1(15.96,64.25) v1(15.96,63.31) v1(15.99,62.45) v1(15.96,32.07) v1(15.94,31.51) v1(16.01,25.44) v1(16.09,47.92) v1(16.09,47) v1(16.09,46.06) v1(16.09,45.12) v1(16.09,44.18) v1(16.06,30.54) v1(16.04,29.66) v1(16.09,28.77) v1(16.06,28.08) v1(16.11,64.96) v1(16.11,43.05) v1(16.29,46.55) v1(16.29,45.56) v1(16.29,23.66) v1(16.27,10.3) v1(16.39,62.93) v1(16.32,47.49) v1(16.33,41.07) v1(16.39,22.49) v1(16.37,21.96) v1(16.39,2.6) v1(16.47,48.65) v1(16.47,25.03) v1(16.44,21.53) v1(16.44,20.05) v1(16.44,18.61) v1(16.44,17.18) v1(16.44,15.76) v1(16.44,14.31) v1(16.42,9.06) v1(16.42,7.99) v1(16.42,6.74) v1(16.57,75.63) v1(16.52,31.59) v1(16.62,47.97) v1(16.7,46.11) v1(16.65,43.04) v1(16.7,33.85) v1(16.8,74.69) v1(16.75,69.86) v1(16.75,67.98) v1(16.75,66.1) v1(16.75,64.2) v1(16.77,47.54) v1(16.75,47.03) v1(16.77,46.6) v1(16.77,45.66) v1(16.77,44.72) v1(16.77,43.98) v1(16.8,35.94) v1(16.8,33.36) v1(16.77,30.24) v1(16.72,27.47) v1(16.72,10.94) v1(16.88,63.34) v1(16.9,48.32) v1(16.9,20.84) v1(16.93,61.58) v1(16.98,43.4) v1(17,31.08) v1(16.93,3.62) v1(17.05,64.96) v1(17.08,59.55) v1(17.05,58.94) v1(17.08,21.58) v1(17.05,0.65) v1(17.13,60.14) v1(17.21,57.39) v1(17.21,56.22) v1(17.16,55.72) v1(17.21,10.35) v1(17.21,9.67) v1(17.13,5.86) v1(17.26,61.99) v1(17.26,58) v1(17.23,56.76) v1(17.31,54.83) v1(17.23,47.38) v1(17.28,26.91) v1(17.36,73.95) v1(17.38,48.65) v1(17.36,47.89) v1(17.36,46.39) v1(17.33,45.94) v1(17.33,45.38) v1(17.32,43.71) v1(17.41,14.03) v1(17.51,69.61) v1(17.51,63.51) v1(17.44,58.51) v1(17.46,55.28) v1(17.49,52.36) v1(17.46,46.95) v1(17.49,44.82) v1(17.49,32.47) v1(17.46,30.67) v1(17.46,20.16) v1(17.46,18.73) v1(17.46,17.31) v1(17.46,15.86) v1(17.44,14.95) v1(17.61,70.7) v1(17.61,70.14) v1(17.61,69.13) v1(17.61,68.64) v1(17.61,64.28) v1(17.59,61.63) v1(17.59,60.21) v1(17.61,52.79) v1(17.61,51.93) v1(17.54,27.47) v1(17.59,25.46) v1(17.59,24.85) v1(17.59,21.55) v1(17.68,44.04) v1(17.65,39.84) v1(17.64,26.18) v1(17.79,53.33) v1(17.79,39.36) v1(17.79,38.75) v1(17.79,38.15) v1(17.79,37.55) v1(17.8,36.92) v1(17.82,75.63) v1(17.84,54.55) v1(17.82,53.91) v1(17.84,51.3) v1(17.82,50.61) v1(17.89,48.71) v1(17.89,48.17) v1(17.89,47.69) v1(17.87,47.23) v1(17.89,46.75) v1(17.84,9.06) v1(17.84,7.99) v1(17.84,6.74) v1(17.84,2.6) v1(17.99,64.96) v1(17.92,59.22) v1(17.92,58.28) v1(17.92,57.34) v1(17.92,56.43) v1(17.92,55.49) v1(17.94,55) v1(17.92,44.74) v1(17.92,44.36) v1(18.1,60.21) v1(18.07,52.44) v1(18.1,51.85) v1(18.1,27.42) v1(18.04,22.59) v1(18.2,70.93) v1(18.17,68.36) v1(18.12,26.68) v1(18.12,20.74) v1(18.3,64.28) v1(18.25,63.51) v1(18.25,61.63) v1(18.3,54.17) v1(18.3,53.2) v1(18.25,39.84) v1(18.27,31.69) v1(18.32,78.22) v1(18.32,75.04) v1(18.38,74.11) v1(18.4,58.76) v1(18.38,57.8) v1(18.35,56.88) v1(18.35,55.94) v1(18.4,39.37) v1(18.4,38.75) v1(18.41,38.15) v1(18.48,55.13) v1(18.45,51.3) v1(18.45,50.66) v1(18.43,37.55) v1(18.43,36.92) v1(18.43,22.14) v1(18.5,19.47) v1(18.5,18.05) v1(18.5,16.6) v1(18.5,15.18) v1(18.48,0.65) v1(18.58,76.52) v1(18.6,59.98) v1(18.53,54.65) v1(18.53,53.71) v1(18.53,52.77) v1(18.53,51.83) v1(18.55,5.86) v1(18.68,70.63) v1(18.71,70.14) v1(18.71,69.58) v1(18.71,69.1) v1(18.63,68.59) v1(18.63,68.01) v1(18.63,67.42) v1(18.65,27.09) v1(18.63,23.05) v1(18.63,9.67) v1(18.73,77.41) v1(18.76,75.83) v1(18.81,61.86) v1(18.81,52.36) v1(18.72,33.67) v1(18.86,66.94) v1(18.86,66.38) v1(18.86,59.22) v1(18.86,58.28) v1(18.86,57.34) v1(18.86,56.43) v1(18.86,55.49) v1(18.88,54.22) v1(18.86,50.13) v1(18.83,14.03) v1(18.93,73.55) v1(18.93,72.84) v1(18.93,72.12) v1(18.93,71.41) v1(18.93,71.01) v1(18.93,65.75) v1(18.93,65.14) v1(18.93,64.55) v1(18.93,63.95) v1(18.93,63.46) v1(18.98,53.35) v1(18.96,51.55) v1(18.96,50.76) v1(19.11,54.8) v1(19.02,39.36) v1(19.02,38.75) v1(19.02,38.15) v1(19.02,37.55) v1(19.02,36.92) v1(19.09,30.85) v1(19.04,28.64) v1(19.09,27.62) v1(19.14,59.98) v1(19.19,33.11) v1(19.19,21.5) v1(19.14,20.08) v1(19.26,56.88) v1(19.26,55.94) v1(19.29,53.94) v1(19.29,53) v1(19.29,52.06) v1(19.29,51.12) v1(19.26,48.96) v1(19.29,48.45) v1(19.29,47.97) v1(19.29,47.49) v1(19.29,45.78) v1(19.28,33.67) v1(19.26,25.77) v1(19.29,9.06) v1(19.29,7.99) v1(19.29,6.74) v1(19.26,2.6) v1(19.34,58.76) v1(19.31,57.8) v1(19.39,50.33) v1(19.31,47.03) v1(19.31,46.19) v1(19.31,45.38) v1(19.44,3.57) v1(19.57,76.14) v1(19.59,54.72) v1(19.52,23.08) v1(19.59,21.15) v1(19.65,78.14) v1(19.62,77.03) v1(19.65,61.71) v1(19.65,60.16) v1(19.67,46.6) v1(19.67,45.02) v1(19.65,44.54) v1(19.66,39.37) v1(19.66,38.75) v1(19.66,38.15) v1(19.66,37.55) v1(19.66,36.93) v1(19.67,33.33) v1(19.65,32.68) v1(19.8,59.22) v1(19.8,58.28) v1(19.8,57.34) v1(19.8,56.43) v1(19.8,55.49) v1(19.72,53.45) v1(19.72,52.54) v1(19.72,51.6) v1(19.8,50.71) v1(19.72,49.26) v1(19.75,13.22) v1(19.85,48.63) v1(19.85,47.99) v1(19.85,47.28) v1(19.91,39.83) v1(19.87,26.35) v1(19.87,9.69) v1(19.9,0.65) v1(19.95,54.14) v1(19.98,30.16) v1(19.98,25.08) v1(19.92,19.47) v1(19.92,18.05) v1(19.92,16.6) v1(19.92,15.18) v1(19.92,13.75) v1(19.98,5.86) v1(20.1,59.98) v1(20.08,49.62) v1(20.08,46.17) v1(20.1,45.5) v1(20.2,56.88) v1(20.2,55.94) v1(20.18,44.54) v1(20.15,33.16) v1(20.28,58.76) v1(20.25,57.8) v1(20.31,53.18) v1(20.23,52.64) v1(20.23,52.11) v1(20.28,51.6) v1(20.23,51.07) v1(20.23,43.24) v1(20.24,39.36) v1(20.24,38.75) v1(20.24,38.15) v1(20.24,37.55) v1(20.24,36.92) v1(20.23,21.1) v1(20.36,73.55) v1(20.36,72.84) v1(20.36,72.12) v1(20.36,71.41) v1(20.36,71.01) v1(20.41,64.91) v1(20.38,64.25) v1(20.36,63.49) v1(20.36,54.95) v1(20.36,54.39) v1(20.38,53.79) v1(20.41,49.95) v1(20.38,49.29) v1(20.38,48.65) v1(20.38,47.99) v1(20.38,47.38) v1(20.41,46.75) v1(20.38,23.05) v1(20.48,77.41) v1(20.51,66.21) v1(20.43,65.65) v1(20.48,12.33) v1(20.53,75.83) v1(20.56,70.63) v1(20.58,70.14) v1(20.58,69.58) v1(20.61,69.1) v1(20.53,61.86) v1(20.61,26.12) v1(20.58,20.08) v1(20.69,68.39) v1(20.69,67.86) v1(20.64,59.98) v1(20.66,46.34) v1(20.66,45.81) v1(20.64,45.15) v1(20.69,44.54) v1(20.66,43.24) v1(20.69,39.82) v1(20.7,37.39) v1(20.64,31.61) v1(20.66,11.39) v1(20.69,10.55) v1(20.69,8.75) v1(20.71,7.99) v1(20.71,6.74) v1(20.69,2.6) v1(20.74,76.42) v1(20.74,67.37) v1(20.74,59.22) v1(20.74,58.28) v1(20.74,57.34) v1(20.74,56.43) v1(20.74,55.97) v1(20.74,55.49) v1(20.72,39.19) v1(20.72,38.58) v1(20.74,38.01) v1(20.74,33.16) v1(20.74,27.09) v1(20.86,74.05) v1(20.86,64.05) v1(20.92,78.19) v1(20.99,64.73) v1(20.97,53.4) v1(21.02,74.94) v1(21.07,71.03) v1(21.07,66.97) v1(21.04,63.54) v1(21.04,32.37) v1(21.04,25.08) v1(21.12,66.43) v1(21.14,61.59) v1(21.14,60.21) v1(21.14,30.09) v1(21.25,68.36) v1(21.27,40.79) v1(21.27,33.16) v1(21.25,27.55) v1(21.22,11.93) v1(21.25,11.09) v1(21.3,9.36) v1(21.37,59.63) v1(21.37,58.69) v1(21.37,57.75) v1(21.37,56.81) v1(21.37,55.87) v1(21.37,53) v1(21.35,19.47) v1(21.35,18.05) v1(21.35,16.6) v1(21.35,15.18) v1(21.35,13.75) v1(21.35,0.65) v1(21.42,65.24) v1(21.42,64.3) v1(21.5,55.41) v1(21.42,5.86) v1(21.55,62.04) v1(21.6,31.61) v1(21.55,26.86) v1(21.6,26.15) v1(21.63,75.55) v1(21.7,74.03) v1(21.65,70.68) v1(21.65,70.14) v1(21.65,69.58) v1(21.65,69.05) v1(21.65,63.31) v1(21.68,56.35) v1(21.63,53.51) v1(21.68,21.07) v1(21.68,12.69) v1(21.75,68.52) v1(21.8,61.63) v1(21.78,48.91) v1(21.83,60.19) v1(21.85,33.26) v1(21.96,59.58) v1(21.93,58.92) v1(21.93,58.31) v1(21.93,57.7) v1(21.98,52.9) v1(21.98,32.37) v1(22.01,20.08) v1(21.93,8.83) v1(21.98,3.62) v1(22.06,64.66) v1(22.11,63.72) v1(22.03,55.23) v1(22.08,46.06) v1(22.08,45.61) v1(22.06,43.27) v1(22.21,62.8) v1(22.13,62.29) v1(22.19,53.51) v1(22.19,48.58) v1(22.13,30.14) v1(22.13,25.08) v1(22.13,7.99) v1(22.13,6.74) v1(22.13,2.6) v1(22.26,57.19) v1(22.24,56.66) v1(22.24,56.17) v1(22.26,55.66) v1(22.22,40.16) v1(22.24,27.5) v1(22.26,26.4) v1(22.39,46.44) v1(22.39,44.67) v1(22.34,36.49) v1(22.39,35.98) v1(22.39,33.41) v1(22.44,61.61) v1(22.44,45.2) v1(22.57,74.69) v1(22.57,69.03) v1(22.57,67.15) v1(22.57,65.27) v1(22.57,63.34) v1(22.52,52.79) v1(22.59,45.86) v1(22.55,40.46) v1(22.6,38.56) v1(22.52,31.61) v1(22.62,64.28) v1(22.62,62.4) v1(22.67,48.1) v1(22.67,47.46) v1(22.67,46.83) v1(22.67,21.04) v1(22.79,70.63) v1(22.77,53.25) v1(22.72,19.19) v1(22.72,17.77) v1(22.72,16.35) v1(22.72,14.9) v1(22.79,13.75) v1(22.77,0.65) v1(22.9,50.28) v1(22.91,40.72) v1(22.87,12.71) v1(22.85,5.86) v1(23,22.72) v1(23,22.06) v1(23.02,64.73) v1(23.07,61.94) v1(23.02,61.25) v1(23.05,39.03) v1(23.02,38.62) v1(23.07,25.06) v1(23.02,23.38) v1(23.15,52.82) v1(23.15,7.66) v1(23.12,6.72) v1(23.23,63.51) v1(23.25,62.7) v1(23.31,40.99) v1(23.33,75.58) v1(23.38,60.62) v1(23.4,59.4) v1(23.35,49.75) v1(23.33,36.31) v1(23.38,33.44) v1(23.43,74) v1(23.46,65.24) v1(23.46,64.3) v1(23.46,59.98) v1(23.43,53.25) v1(23.43,50.28) v1(23.47,35.34) v1(23.48,30.39) v1(23.48,27.55) v1(23.48,26.48) v1(23.43,20.08) v1(23.61,52.57) v1(23.56,49.21) v1(23.58,43.83) v1(23.58,32.42) v1(23.56,21.07) v1(23.56,2.6) v1(23.63,78.19) v1(23.63,76.75) v1(23.71,63.84) v1(23.71,61.63) v1(23.68,56.96) v1(23.71,56.5) v1(23.68,56.02) v1(23.71,55.54) v1(23.63,51.93) v1(23.63,51.4) v1(23.65,41.33) v1(23.76,54.85) v1(23.79,54.24) v1(23.76,43.17) v1(23.81,42.53) v1(23.81,36.58) v1(23.72,35.94) v1(23.76,23.36) v1(23.89,63.11) v1(23.84,62.34) v1(23.86,53.66) v1(23.85,33.43) v1(23.86,19.16) v1(23.86,17.72) v1(23.86,16.29) v1(23.86,14.87) v1(23.84,13.68) v1(23.96,64.71) v1(23.99,60.97) v1(23.94,50.38) v1(23.94,49.72) v1(23.96,48.83) v1(23.99,44.18) v1(24.06,60.03) v1(24.04,59.22) v1(24.09,29.68) v1(24.01,25.03) v1(24.01,6.74) v1(24.01,5.8) v1(24.19,47.13) v1(24.15,41.31) v1(24.12,22.97) v1(24.19,0.65) v1(24.22,57.19) v1(24.27,51.4) v1(24.22,47.79) v1(24.22,45.91) v1(24.22,45.17) v1(24.24,37.01) v1(24.26,36.17) v1(24.31,33.41) v1(24.34,75.68) v1(24.39,58.71) v1(24.34,58.18) v1(24.34,56.45) v1(24.37,26.66) v1(24.45,74.69) v1(24.45,72.78) v1(24.45,70.88) v1(24.45,69.03) v1(24.45,67.15) v1(24.45,65.27) v1(24.47,64.28) v1(24.45,63.34) v1(24.47,62.4) v1(24.45,61.46) v1(24.47,60.52) v1(24.45,59.58) v1(24.45,57.7) v1(24.45,55.82) v1(24.47,54.9) v1(24.45,53.96) v1(24.47,53.02) v1(24.45,52.08) v1(24.5,50.84) v1(24.45,50.2) v1(24.47,49.26) v1(24.45,48.32) v1(24.45,46.44) v1(24.45,44.59) v1(24.42,42.58) v1(24.5,32.42) v1(24.61,41.3) v1(24.55,30.34) v1(24.55,23.36) v1(24.55,12.66) v1(24.57,3.67) v1(24.7,43.55) v1(24.67,36.51) v1(24.67,21.07) v1(24.7,4.69) v1(24.8,51.42) v1(24.8,47) v1(24.75,45.66) v1(24.75,27.52) v1(24.9,61.89) v1(24.9,60.08) v1(24.9,59.14) v1(24.9,58.23) v1(24.85,57.16) v1(24.88,55.33) v1(24.88,54.39) v1(24.88,53.45) v1(24.88,52.57) v1(24.9,48.68) v1(24.85,47.66) v1(24.86,40.88) v1(24.81,37) v1(24.88,20.08) v1(24.88,18.99) v1(24.88,17.54) v1(24.88,16.12) v1(24.88,14.67) v1(24.88,5.98) v1(24.93,56.3) v1(24.98,50.46) v1(24.95,49.7) v1(24.98,42.58) v1(24.97,33.59) v1(24.93,24.98) v1(25,10.12) v1(24.98,2.6) v1(25.06,78.19) v1(25.06,76.75) v1(25.08,34.76) v1(25.06,11.29) v1(25.13,34.11) v1(25.28,51.58) v1(25.22,40.55) v1(25.23,40.09) v1(25.23,39.61) v1(25.31,39.15) v1(25.31,38.67) v1(25.31,37.26) v1(25.26,13.35) v1(25.36,65.19) v1(25.36,64.25) v1(25.36,63.31) v1(25.36,62.37) v1(25.36,61.46) v1(25.36,60.52) v1(25.36,59.58) v1(25.36,58.64) v1(25.36,57.7) v1(25.36,56.76) v1(25.36,55.82) v1(25.36,54.88) v1(25.36,53.94) v1(25.36,53) v1(25.36,52.18) v1(25.39,50.94) v1(25.39,50) v1(25.39,49.06) v1(25.39,48.12) v1(25.39,47.18) v1(25.39,46.24) v1(25.39,45.58) v1(25.41,44.64) v1(25.35,38.2) v1(25.33,37.72) v1(25.33,12.38) v1(25.46,42.38) v1(25.46,35.15) v1(25.44,32.42) v1(25.49,26.66) v1(25.58,33.64) v1(25.56,21.53) v1(25.54,4.13) v1(25.64,43.47) v1(25.64,5.12) v1(25.64,3.14) v1(25.64,0.65) v1(25.77,75.68) v1(25.74,42.04) v1(25.72,23.46) v1(25.74,22.11) v1(25.83,35.56) v1(25.84,34.65) v1(25.89,34.09) v1(25.94,30.65) v1(25.94,20.43) v1(25.94,18.99) v1(25.94,17.54) v1(25.94,16.12) v1(25.94,14.69) v1(25.94,13.25) v1(25.94,11.82) v1(25.94,10.4) v1(25.94,9.08) v1(26.05,41.68) v1(26.22,35.97) v1(26.25,27.62) v1(26.22,25.87) v1(26.33,74.69) v1(26.33,72.78) v1(26.33,70.88) v1(26.33,69.03) v1(26.33,67.15) v1(26.33,65.27) v1(26.35,64.28) v1(26.33,63.34) v1(26.35,62.4) v1(26.33,61.46) v1(26.35,60.52) v1(26.33,59.58) v1(26.35,58.64) v1(26.33,57.7) v1(26.35,56.76) v1(26.33,55.82) v1(26.35,54.9) v1(26.33,53.96) v1(26.35,53.02) v1(26.33,52.08) v1(26.35,51.14) v1(26.33,50.2) v1(26.35,49.26) v1(26.33,48.32) v1(26.35,47.38) v1(26.33,46.44) v1(26.35,45.5) v1(26.33,44.59) v1(26.33,42.71) v1(26.33,33.31) v1(26.38,32.42) v1(26.5,78.19) v1(26.5,76.75) v1(26.43,41.31) v1(26.45,4.41) v1(26.58,43.55) v1(26.59,36.41) v1(26.63,40.82) v1(26.64,40.28) v1(26.66,39.74) v1(26.66,39.17) v1(26.64,38.6) v1(26.66,38.05) v1(26.64,37.5) v1(26.67,36.97) v1(26.68,29.83) v1(26.68,21.17) v1(26.76,34.66) v1(26.88,19.6) v1(26.88,18.15) v1(26.88,16.73) v1(26.88,15.3) v1(26.88,13.86) v1(26.88,12.43) v1(26.88,11.01) v1(26.88,9.56) v1(27.09,26.68) v1(27.04,8.12) v1(27.06,0.65) v1(27.19,75.68) v1(27.16,30.59) v1(27.16,23.2) v1(27.16,22.09) v1(27.29,20.66) v1(27.34,65.19) v1(27.34,64.25) v1(27.32,63.36) v1(27.32,62.42) v1(27.32,61.48) v1(27.32,60.54) v1(27.32,59.6) v1(27.32,58.66) v1(27.32,57.72) v1(27.32,56.78) v1(27.32,55.84) v1(27.32,54.9) v1(27.32,53.96) v1(27.32,53.05) v1(27.32,52.11) v1(27.32,51.17) v1(27.32,50.23) v1(27.32,49.29) v1(27.32,48.35) v1(27.32,47.41) v1(27.32,46.47) v1(27.32,45.53) v1(27.39,44.62) v1(27.37,43.07) v1(27.34,41.75) v1(27.34,39.87) v1(27.34,37.99) v1(27.34,36.13) v1(27.34,33.77) v1(27.32,32.42) v1(27.34,24.47) v1(27.65,21.6) v1(27.8,27.17) v1(27.72,22.16) v1(27.72,11.72) v1(27.72,10.27) v1(27.72,8.85) v1(27.8,7.35) v1(27.9,34.33) v1(27.93,78.19) v1(27.93,76.75) v1(28.03,25.74) v1(28.03,19.95) v1(28.03,18.53) v1(28.03,17.11) v1(28.03,15.66) v1(28.03,14.24) v1(28.03,12.81) v1(28.18,74.69) v1(28.18,72.78) v1(28.18,70.88) v1(28.18,69.03) v1(28.18,67.15) v1(28.18,65.27) v1(28.18,63.34) v1(28.18,61.46) v1(28.18,59.58) v1(28.18,57.7) v1(28.18,55.82) v1(28.18,53.96) v1(28.18,52.08) v1(28.18,50.2) v1(28.18,48.32) v1(28.18,46.44) v1(28.18,44.59) v1(28.18,42.71) v1(28.18,40.83) v1(28.18,38.95) v1(28.18,37.07) v1(28.18,35.19) v1(28.18,33.34) v1(28.15,21.53) v1(28.2,3.8) v1(28.2,2.63) v1(28.23,64.28) v1(28.23,62.4) v1(28.23,60.52) v1(28.23,58.64) v1(28.23,56.76) v1(28.23,54.9) v1(28.23,53.02) v1(28.23,51.14) v1(28.23,49.26) v1(28.23,47.38) v1(28.23,45.5) v1(28.26,32.42) v1(28.43,43.55) v1(28.46,30.59) v1(28.48,0.65) v1(28.59,12.46) v1(28.64,75.68) v1(28.74,3.21) v1(28.87,41.87) v1(28.87,39.99) v1(28.87,38.11) v1(28.87,36.23) v1(28.89,34.23) v1(28.84,15.33) v1(28.89,14.08) v1(28.99,33.29) v1(28.99,27.14) v1(29.04,26.02) v1(29.04,3.77) v1(29.2,65.24) v1(29.2,64.3) v1(29.2,63.36) v1(29.2,62.42) v1(29.2,61.48) v1(29.2,60.57) v1(29.2,59.63) v1(29.2,58.69) v1(29.2,57.75) v1(29.2,56.81) v1(29.2,55.87) v1(29.2,54.93) v1(29.2,53.99) v1(29.2,53.05) v1(29.2,52.11) v1(29.2,51.17) v1(29.2,50.25) v1(29.2,49.31) v1(29.2,48.37) v1(29.2,47.44) v1(29.2,46.5) v1(29.2,45.56) v1(29.2,32.42) v1(29.17,2.6) v1(29.25,44.46) v1(29.25,30.67) v1(29.35,78.19) v1(29.35,76.75) v1(29.32,14.62) v1(29.35,13.32) v1(29.47,20.84) v1(29.45,19.62) v1(29.5,7.13) v1(29.58,24.42) v1(29.55,23.38) v1(29.53,22.21) v1(29.58,11.21) v1(29.6,10.43) v1(29.6,9.64) v1(29.53,8.85) v1(29.68,3.16) v1(29.73,29.78) v1(29.73,28.18) v1(29.78,27.14) v1(29.88,15.58) v1(29.96,11.93) v1(29.93,0.65) v1(30.06,75.68) v1(30.06,74.69) v1(30.06,72.78) v1(30.06,70.88) v1(30.06,69.03) v1(30.06,67.15) v1(30.06,65.27) v1(30.08,63.36) v1(30.08,61.48) v1(30.08,59.63) v1(30.08,57.75) v1(30.08,55.87) v1(30.08,53.99) v1(30.08,52.11) v1(30.08,50.25) v1(30.08,48.37) v1(30.08,46.5) v1(30.08,44.62) v1(30.08,42.74) v1(30.08,40.86) v1(30.08,39) v1(30.08,37.12) v1(30.08,35.24) v1(30.08,33.36) v1(30.19,14.87) v1(30.21,3.82) v1(30.26,14.11) v1(30.29,2.5) v1(30.59,20.94) v1(30.69,19.88) v1(30.67,12.59) v1(30.8,78.19) v1(30.8,76.75) v1(30.72,23.15) v1(30.72,15.28) v1(30.72,3.16) v1(30.9,25.59) v1(30.87,14.69) v1(30.97,31.53) v1(30.97,10.86) v1(30.95,9.77) v1(31.02,32.3) v1(31.02,30.9) v1(31.08,28.46) v1(31.02,10.3) v1(31.05,3.72) v1(31.05,2.58) v1(31.13,29.68) v1(31.3,32.98) v1(31.28,21.37) v1(31.23,13.15) v1(31.38,15.18) v1(31.35,0.65) v1(31.48,75.68) v1(31.46,30.49) v1(31.48,27.93) v1(31.48,26.71) v1(31.43,24.96) v1(31.43,11.19) v1(31.51,2.99) v1(31.58,10.58) v1(31.63,18.07) v1(31.63,17.41) v1(31.63,16.73) v1(31.63,3.85) v1(31.81,23.43) v1(31.81,13.75) v1(31.76,11.65) v1(31.91,2.55) v1(31.94,74.69) v1(31.94,72.78) v1(31.94,70.88) v1(31.94,69.03) v1(31.94,67.15) v1(31.94,65.27) v1(31.96,63.36) v1(31.96,61.48) v1(31.96,59.63) v1(31.96,57.75) v1(31.96,55.87) v1(31.96,53.99) v1(31.96,52.11) v1(31.96,50.25) v1(31.96,48.37) v1(31.96,46.5) v1(31.96,44.62) v1(31.96,42.74) v1(31.96,40.86) v1(31.96,39) v1(31.96,37.12) v1(31.96,35.24) v1(31.96,33.36) v1(31.96,11.04) v1(31.99,3.32) v1(32.07,27.14) v1(32.01,20.94) v1(32.17,28) v1(32.14,19.88) v1(32.22,78.19) v1(32.22,76.75) v1(32.27,30.7) v1(32.4,26.15) v1(32.32,18.07) v1(32.32,17.39) v1(32.32,16.73) v1(32.35,14.08) v1(32.68,27.5) v1(32.62,12.41) v1(32.8,25.36) v1(32.75,19.9) v1(32.78,0.65) v1(32.93,75.68) v1(32.98,33.41) v1(33.01,22.16) v1(32.98,18.07) v1(32.98,17.41) v1(32.98,16.73) v1(32.93,14.34) v1(33.08,40.12) v1(33.06,24.12) v1(33.08,19.5) v1(33.26,38.24) v1(33.31,27.14) v1(33.39,28) v1(33.39,10.88) v1(33.46,30.72) v1(33.46,20.94) v1(33.56,19.88) v1(33.54,12.41) v1(33.64,78.19) v1(33.64,76.75) v1(33.67,73.14) v1(33.62,6.57) v1(33.69,5.37) v1(33.72,8.5) v1(33.82,74.69) v1(33.82,69.03) v1(33.82,67.15) v1(33.82,65.27) v1(33.84,63.36) v1(33.84,61.48) v1(33.84,59.63) v1(33.84,57.75) v1(33.84,55.87) v1(33.84,53.99) v1(33.84,52.11) v1(33.84,50.25) v1(33.84,48.37) v1(33.84,46.5) v1(33.84,44.62) v1(33.84,42.74) v1(33.84,37.12) v1(33.84,35.24) v1(33.84,33.36) v1(33.84,22.34) v1(33.95,23.84) v1(34.07,23.23) v1(34.07,13.15) v1(34.2,27.14) v1(34.2,7.84) v1(34.2,7.15) v1(34.28,41.72) v1(34.28,26.15) v1(34.22,25.36) v1(34.25,15.43) v1(34.28,11.09) v1(34.28,9.56) v1(34.28,4.94) v1(34.3,3.52) v1(34.22,0.65) v1(34.35,75.68) v1(34.33,12.36) v1(34.33,10.48) v1(34.43,19.29) v1(34.5,18.61) v1(34.58,30.62) v1(34.55,27.93) v1(34.53,13.83) v1(34.86,33.39) v1(34.86,20.92) v1(34.91,13.2) v1(35.01,36.44) v1(35.01,23.15) v1(34.99,19.88) v1(35.09,78.19) v1(35.09,76.75) v1(35.04,27.04) v1(35.06,14.03) v1(35.27,14.57) v1(35.44,19.09) v1(35.57,27.93) v1(35.6,13.73) v1(35.7,74.69) v1(35.7,67.15) v1(35.7,65.27) v1(35.7,30.57) v1(35.67,25.36) v1(35.7,23.15) v1(35.65,0.65) v1(35.77,75.68) v1(35.72,63.36) v1(35.72,61.48) v1(35.72,59.63) v1(35.72,57.75) v1(35.72,55.87) v1(35.72,53.99) v1(35.72,52.11) v1(35.72,50.25) v1(35.72,48.37) v1(35.72,46.5) v1(35.72,44.62) v1(35.72,42.74) v1(35.72,35.24) v1(35.72,33.36) v1(35.75,27.09) v1(35.8,14.26) v1(35.85,29.71) v1(35.82,28.87) v1(35.88,1.44) v1(35.98,19.8) v1(36.13,26.15) v1(36.16,21.4) v1(36.21,9.49) v1(36.18,8.47) v1(36.21,7.46) v1(36.16,6.44) v1(36.18,5.47) v1(36.21,4.36) v1(36.21,3.39) v1(36.28,36.34) v1(36.31,18.94) v1(36.31,17.56) v1(36.28,11.04) v1(36.23,10.27) v1(36.38,30.14) v1(36.36,14.87) v1(36.33,14.34) v1(36.51,78.19) v1(36.51,76.75) v1(36.43,30.85) v1(36.49,24.14) v1(36.43,2.07) v1(36.64,27.12) v1(36.71,33.36) v1(36.79,15.46) v1(36.89,42.2) v1(36.82,20.66) v1(36.89,1.36) v1(36.99,10.15) v1(36.99,8.09) v1(36.94,7.07) v1(37.09,16.12) v1(37.07,9.46) v1(37.07,0.65) v1(37.2,26.45) v1(37.17,10.76) v1(37.22,75.68) v1(37.25,25.57) v1(37.27,24.14) v1(37.3,22.11) v1(37.3,20.05) v1(37.27,12.38) v1(37.32,23.15) v1(37.35,18.94) v1(37.35,17.92) v1(37.35,16.93) v1(37.32,3.75) v1(37.5,8.6) v1(37.45,6.46) v1(37.48,5.42) v1(37.5,4.53) v1(37.58,74.69) v1(37.58,67.15) v1(37.58,65.27) v1(37.6,63.36) v1(37.6,61.48) v1(37.6,59.63) v1(37.6,57.75) v1(37.6,55.87) v1(37.6,53.99) v1(37.6,52.11) v1(37.6,50.25) v1(37.6,48.37) v1(37.6,46.5) v1(37.6,44.62) v1(37.6,42.74) v1(37.58,35.24) v1(37.58,33.36) v1(37.6,7.56) v1(37.73,12.89) v1(37.73,1.36) v1(37.88,10.35) v1(37.83,2.1) v1(37.93,78.19) v1(37.93,76.75) v1(38.06,32.75) v1(38.21,31.92) v1(38.19,30.98) v1(38.31,41.36) v1(38.34,37.07) v1(38.36,8.34) v1(38.42,30.14) v1(38.47,29.32) v1(38.42,9.49) v1(38.42,7.46) v1(38.49,5.02) v1(38.44,4.2) v1(38.42,3.32) v1(38.54,6.03) v1(38.52,0.65) v1(38.64,75.68) v1(38.7,13.83) v1(38.62,2.12) v1(38.8,1.38) v1(38.9,28.54) v1(38.92,32.65) v1(38.97,30.77) v1(39.25,14.26) v1(39.38,78.19) v1(39.38,76.75) v1(39.38,14.97) v1(39.38,13.53) v1(39.38,12.1) v1(39.38,10.68) v1(39.38,9.23) v1(39.38,7.81) v1(39.38,6.39) v1(39.38,4.94) v1(39.38,3.52) v1(39.38,2.1) v1(39.38,0.65) v1(39.43,74.69) v1(39.46,72.89) v1(39.46,71.01) v1(39.46,69.13) v1(39.46,67.25) v1(39.46,65.39) v1(39.46,63.51) v1(39.46,61.63) v1(39.46,59.75) v1(39.46,57.87) v1(39.46,55.99) v1(39.46,54.14) v1(39.46,52.26) v1(39.46,50.38) v1(39.46,48.5) v1(39.46,46.62) v1(39.46,44.74) v1(39.46,42.89) v1(39.46,41.01) v1(39.46,39.13) v1(39.46,37.25) v1(39.46,35.37) v1(39.46,33.52) v1(39.46,31.64) v1(39.46,29.76) v1(39.46,27.88) v1(39.46,26) v1(39.46,24.12) v1(39.46,22.26) v1(39.46,20.38) v1(39.46,18.5) v1(39.46,16.62)
